# Altium PCB ChassisController.PcbDoc (part 2 of 2)
Units mm, origin at the board's own origin, x right, y up, seen from the top; angles counter-clockwise.
Board outline 110.4 x 66.5 mm, 2 copper layers (Top Layer, Bottom Layer), stack 1.906 mm thick; 125 components, 214 nets, 559 pads, 255 vias.
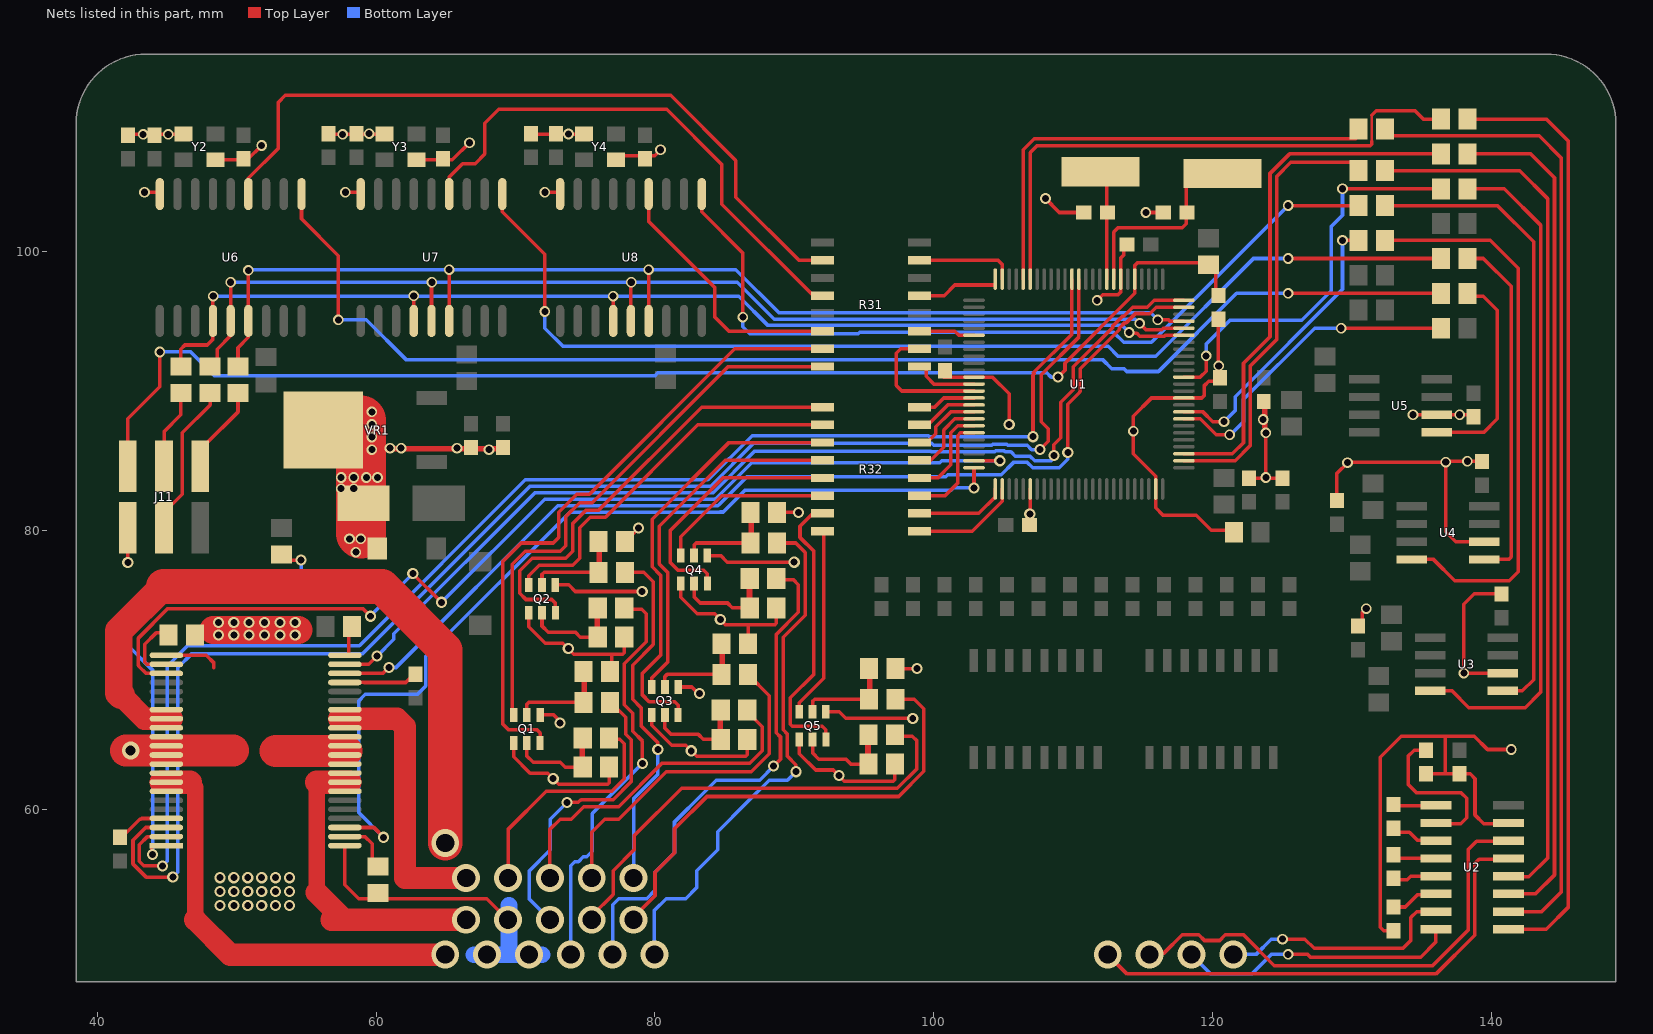
[diagram p2: the nets of this part, all layers, seen from the top]

## Via types
v1: diameter 0.762, hole 0.508, Top Layer to Bottom Layer, 111 vias
v2: diameter 0.8, hole 0.5, Top Layer to Bottom Layer, 71 vias
v3: diameter 2, hole 1.3, Top Layer to Bottom Layer, 60 vias
v4: diameter 1.27, hole 0.711, Top Layer to Bottom Layer, 12 vias
v5: diameter 6.5, hole 6.5, Top Layer to Bottom Layer, 1 vias

## Nets (pads, with @x,y where several pads share a name; then routed paths per layer and width w, separated by ;. In a path a pad name is that pad's centre, name@x,y a point inside that pad or via, vN(x,y) a via of type N, cw(c..) or ccw(c..) an arc to the next point about the centre after c; other vN are vias at no path point) (continued)
CAN_STB_A_link: R52.1 U1.8 | length 22.9
  Top Layer w0.254: U1.8@117.925,88 119.1,88 120.239,86.861 v1(121.207,86.861) ; v1(129.2,94.5) R52.1@136.35,94.5
  Bottom Layer w0.254: v1@121.3,86.9 122.2,87.8 122.2,89.4 127.3,94.5 v1(129.2,94.5)
CAN_STB_B: R47.2 U4.8 | length 40.7
  Top Layer w0.254: R47.2@132.35,100.8 139.9,100.8 141.9,98.8 141.9,77.044 141.256,76.4 137.348,76.4 135.827,77.921 U4.8@134.272,77.921
CAN_STB_B_link: R47.1 U1.9 | length 20.8
  Top Layer w0.254: U1.9@117.925,88.5 119.3,88.5 120,87.8 v1(120.8,87.8) ; v1(129.3,100.8) R47.1@130.45,100.8
  Bottom Layer w0.254: v1(120.8,87.8) 121.6,88.6 121.6,89.6 129.3,97.3 v1(129.3,100.8)
CAN_STB_C: R44.2 U3.8 | length 48.7
  Top Layer w0.254: U3.8@135.6,68.5 137.155,68.5 138.355,67.3 142.4,67.3 143.5,68.4 143.5,101.9 140.9,104.5 R44.2@138.25,104.5
CAN_STB_C_link: R44.1 U1.14 | length 29
  Top Layer w0.254: U1.14@117.925,91 119.1,91 119.525,91.425 v1(119.525,92.525) ; v1(129.3,104.5) R44.1@136.35,104.5
  Bottom Layer w0.254: v1(119.525,92.525) 119.525,93.375 121.233,95.083 126.383,95.083 128.5,97.2 128.5,101.8 129.3,102.6 v1(129.3,104.5)
CAN_TX_A: R50.2 U5.1 | length 15
  Top Layer w0.254: U5.1@136.05,87.03 139.43,87.03 140.4,88 140.4,95.8 139.4,96.8 R50.2@138.4,96.8
CAN_TX_A_link: R50.1 U6.1 | length 93
  Top Layer w0.254: U6.1@54.655,104.125 54.655,102.345 57.3,99.7 57.3,98.9 v1(57.3,95.1) ; v1(125.4,97) R50.1@136.35,97
  Bottom Layer w0.254: v1(57.3,95.1) 59.3,95.1 62.146,92.254 112.088,92.254 112.755,91.587 113.631,91.587 113.818,91.4 116.1,91.4 121.7,97 v1(125.4,97)
CAN_TX_B: R48.2 U4.1 | length 25.4
  Top Layer w0.254: R48.2@138.25,99.5 139.4,99.5 141.4,97.5 141.4,78.1 141.221,77.921 U4.1@139.472,77.921
CAN_TX_B_link: R48.1 U7.1 | length 78.9
  Top Layer w0.254: U7.1@69.055,104.125 69.055,102.845 72.1,99.8 v1(72.1,95.7) ; v1(125.4,99.5) R48.1@136.35,99.5
  Bottom Layer w0.254: v1(72.1,95.7) 72.1,94.5 73.4,93.2 112.5,93.2 113.2,92.5 115.916,92.5 122.916,99.5 v1(125.4,99.5)
CAN_TX_C: R45.2 U3.1 | length 45.7
  Top Layer w0.254: R45.2@132.35,103.3 140.4,103.3 143,100.7 143,69.3 142.2,68.5 U3.1@140.8,68.5
CAN_TX_C_link: R45.1 U8.1 | length 59.5
  Top Layer w0.254: U8.1@83.355,104.125 83.355,102.845 86.3,99.9 v1(86.3,95.3) ; v1(125.4,103.3) R45.1@130.45,103.3
  Bottom Layer w0.254: v1(86.3,95.3) 86.3,94.6 86.792,94.108 94.584,94.108 94.676,94.2 112.9,94.2 113.608,93.492 115.592,93.492 115.6,93.5 v1(125.4,103.3)
CAN_TXF_A: R31.2 U6.4 | length 53.1
  Top Layer w0.254: U6.4@50.845,104.125 50.845,105.245 53,107.4 53,110.7 53.5,111.2 81.126,111.2 85.8,106.526 85.8,103.9 90.325,99.375 R31.2@92.025,99.375
CAN_TXF_A_link: R31.15 U1.49 | length 7.1
  Top Layer w0.254: R31.15@98.975,99.375 104.6,99.375 104.9,99.075 U1.49@104.9,98.025
CAN_TXF_B: R31.4 U7.4 | length 38.5
  Top Layer w0.254: U7.4@65.245,104.125 65.245,105.345 66.2,106.3 67.1,106.3 67.8,107 67.8,109.2 68.8,110.2 80.842,110.2 84.8,106.242 84.8,103.4 91.365,96.835 R31.4@92.025,96.835
CAN_TXF_B_link: R31.13 U1.50 | length 5.7
  Top Layer w0.254: R31.13@98.975,96.835 100.734,96.835 101.499,97.6 U1.50@104.375,97.6
CAN_TXF_C: R31.6 U8.4 | length 18.9
  Top Layer w0.254: U8.4@79.545,104.125 79.545,102.155 84.3,97.4 84.3,95.3 85.305,94.295 R31.6@92.025,94.295
CAN_TXF_C_link: R31.11 U1.56 | length 4
  Top Layer w0.254: R31.11@98.975,94.295 101.505,94.295 101.8,94 U1.56@102.875,94
CCP1A: C2.2 pad.26 | length 5
  Top Layer w0.254: pad.26@57.764,69.101 59.141,69.101 59.14,69.1 62.125,69.1 C2.2@62.55,69.525
CCP1B: C1.2 pad.4 | length 3.9
  Top Layer w0.254: C1.2@41.7,57.925 43.065,59.29 43.143,59.29 43.201,59.348 pad.4@44.964,59.348
CCP2A: 
CCP2B: 
CS_CAN_A: 
CS_CAN_B: 
CS_CAN_C: 
Dig1_link: R31.9 U1.63 | length 4.2
  Top Layer w0.254: R31.9@99.45,91.55 99.45,91.05 100,90.5 U1.63@102.875,90.5
Dig1_Ser: Q1.6 R31.8 | length 40.2
  Top Layer w0.254: Q1.6@69.766,66.775 69.766,77.566 70.7,78.5 73.2,78.5 73.6,78.9 73.6,81 74.6,82 75.5,82 85.255,91.755 R31.8@92.025,91.755
Dig1_Split: Q1.2 R1.1 R2.1 | length 7.3
  Top Layer w0.254: Q1.2@70.816,64.775 70.816,63.825 71.266,63.375 73.216,63.375 73.566,63.025 R1.1@74.791,63.025
  Top Layer w0.4: R1.1@74.791,63.025 R2.1@74.791,65.025
Dig2_link: R31.10 U1.64 | length 9.9
  Top Layer w0.254: R31.10@98.975,93.025 97.625,93.025 97.3,92.7 97.3,90.4 97.7,90 U1.64@102.875,90
Dig2_Ser: Q1.3 R31.7 | length 45.6
  Top Layer w0.254: Q1.3@71.766,64.775 71.766,65.475 71.516,65.725 69.475,65.725 69.1,66.1 69.1,77.8 70.4,79.1 72.7,79.1 73.1,79.5 73.1,81.3 74.4,82.6 75.3,82.6 85.725,93.025 R31.7@92.025,93.025
Dig2_Split: Q1.5 R3.1 R4.1 | length 6.8
  Top Layer w0.254: Q1.5@70.816,66.775 70.816,67.525 70.966,67.675 R3.1@74.866,67.675
  Top Layer w0.4: R3.1@74.916,67.6 R4.1@74.916,69.575
Dig3_link: R32.15 U1.66 | length 4.5
  Top Layer w0.254: R32.15@98.975,87.575 99.575,87.575 101,89 U1.66@102.875,89
Dig3_Ser: Q2.6 R32.2 | length 27.5
  Top Layer w0.254: Q2.6@70.95,76.1 70.95,76.75 71.7,77.5 74.1,77.5 74.6,78 74.6,80.2 75.35,80.95 76.45,80.95 83.075,87.575 R32.2@92.025,87.575
Dig3_Split: Q2.2 R5.1 R6.1 | length 7.3
  Top Layer w0.254: Q2.2@71.9,74.1 71.9,73.15 72.35,72.7 74.3,72.7 74.65,72.35 R5.1@75.875,72.35
  Top Layer w0.4: R5.1@75.875,72.35 R6.1@75.875,74.35
Dig4_link: R32.13 U1.68 | length 5.1
  Top Layer w0.254: R32.13@99.775,85.035 100.7,85.96 100.7,87.2 101.5,88 U1.68@102.875,88
Dig4_Ser: Q3.6 R32.4 | length 25.9
  Top Layer w0.254: Q3.6@79.766,68.775 79.766,69.425 80.9,70.559 80.9,77 80.3,77.6 80.3,80.3 85.035,85.035 R32.4@92.025,85.035
Dig4_Split: Q3.2 R9.1 R10.1 | length 7.3
  Top Layer w0.254: Q3.2@80.716,66.775 80.716,65.825 81.166,65.375 83.116,65.375 83.466,65.025 R9.1@84.691,65.025
  Top Layer w0.4: R9.1@84.691,65.025 R10.1@84.691,67.025
Dig5_link: R32.9 U1.77 | length 6.9
  Top Layer w0.254: R32.9@99.775,79.955 102.755,79.955 104.9,82.1 U1.77@104.9,82.975
Dig5_Ser: Q5.6 R32.8 | length 13.7
  Top Layer w0.254: Q5.6@90.35,67 90.35,67.65 92.107,69.407 R32.8@92.107,79.955
Dig5_Split: Q5.2 R17.1 R18.1 | length 7.3
  Top Layer w0.254: Q5.2@91.3,65 91.3,64.05 91.75,63.6 93.7,63.6 94.05,63.25 R17.1@95.275,63.25
  Top Layer w0.4: R17.1@95.275,63.25 R18.1@95.275,65.25
Dig6_link: R32.11 U1.70 | length 7.8
  Top Layer w0.254: R32.11@98.975,82.5 100.8,82.5 101.7,83.4 101.7,86.8 101.9,87 U1.70@102.875,87
Dig6_Ser: Q4.6 R32.6 | length 12.7
  Top Layer w0.254: Q4.6@81.85,78.2 81.85,79.55 84.8,82.5 R32.6@92.025,82.5
Dig6_Split: Q4.2 R13.1 R14.1 | length 7.3
  Top Layer w0.254: Q4.2@82.8,76.2 82.8,75.25 83.25,74.8 85.2,74.8 85.55,74.45 R13.1@86.775,74.45
  Top Layer w0.4: R13.1@86.775,74.45 R14.1@86.775,76.45
Dig7_link: R32.14 U1.67 | length 4.3
  Top Layer w0.254: R32.14@99.7,86.5 100.127,86.927 100.127,87.427 101.2,88.5 U1.67@102.875,88.5
Dig7_Ser: Q3.3 R32.3 | length 31.5
  Top Layer w0.254: Q3.3@81.666,66.775 81.666,67.475 81.416,67.725 79.575,67.725 79.1,68.2 79.1,69.759 80.4,71.059 80.4,76.793 79.8,77.393 79.8,80.8 85.305,86.305 R32.3@92.025,86.305
Dig7_Split: Q3.5 R11.1 R12.1 | length 6.8
  Top Layer w0.254: Q3.5@80.716,68.775 80.716,69.525 80.866,69.675 R11.1@84.766,69.675
  Top Layer w0.4: R11.1@84.816,69.6 R12.1@84.816,71.575
Dig8_link: R32.10 U1.76 | length 5.7
  Top Layer w0.254: R32.10@99.775,81.225 103.225,81.225 104.4,82.4 U1.76@104.4,82.975
Dig8_Ser: Q5.3 R32.7 | length 20.2
  Top Layer w0.254: R32.7@91.5,81.2 91.3,81.2 90.4,80.3 90.4,79.5 91.4,78.5 91.4,69.7 89.7,68 89.7,66.1 89.85,65.95 92,65.95 92.25,65.7 Q5.3@92.25,65
Dig8_Split: Q5.5 R19.1 R20.1 | length 6.8
  Top Layer w0.254: Q5.5@91.3,67 91.3,67.75 91.45,67.9 R19.1@95.35,67.9
  Top Layer w0.4: R19.1@95.4,67.825 R20.1@95.4,69.8
Dig9_link: R32.12 U1.69 | length 6.8
  Top Layer w0.254: R32.12@98.975,83.765 100.265,83.765 101.2,84.7 101.2,87 101.7,87.5 U1.69@102.875,87.5
Dig9_Ser: Q4.3 R32.5 | length 18.5
  Top Layer w0.254: Q4.3@83.75,76.2 83.75,76.9 83.5,77.15 81.65,77.15 81.1,77.7 81.1,80 84.865,83.765 R32.5@92.025,83.765
Dig9_Split: Q4.5 R15.1 R16.1 | length 6.8
  Top Layer w0.254: Q4.5@82.8,78.2 82.8,78.95 82.95,79.1 R15.1@86.85,79.1
  Top Layer w0.4: R15.1@86.9,79.025 R16.1@86.9,81
Dig10_link: R32.16 U1.65 | length 4.2
  Top Layer w0.254: R32.16@98.975,88.845 100.045,88.845 100.7,89.5 U1.65@102.875,89.5
Dig10_Ser: Q2.3 R32.1 | length 32.9
  Top Layer w0.254: Q2.3@72.85,74.1 72.85,74.8 72.6,75.05 70.75,75.05 70.3,75.5 70.3,77.1 71.2,78 73.6,78 74.1,78.5 74.1,80.5 75.05,81.45 75.95,81.45 83.345,88.845 R32.1@92.025,88.845
Dig10_Split: Q2.5 R7.1 R8.1 | length 6.8
  Top Layer w0.254: Q2.5@71.9,76.1 71.9,76.85 72.05,77 R7.1@75.95,77
  Top Layer w0.4: R7.1@76,76.925 R8.1@76,78.9
Dig_In1: R2.2 | length 17.1
  Top Layer w0.254: v3(69.463,55.085) 69.463,58.563 72.2,61.3 76.9,61.3 77.8,62.2 77.8,64.7 77.475,65.025 R2.2@76.691,65.025
Dig_In2: R3.2 | length 21.7
  Top Layer w0.254: v2(73.7,60.5) 74.5,60.5 74.7,60.7 77,60.7 78.3,62 78.3,65 77.9,65.4 77.9,66.6 76.825,67.675 R3.2@76.766,67.675
  Bottom Layer w0.254: v3(72.463,52.085) 71,53.548 71,55.6 72.5,57.1 72.5,59.3 v2(73.7,60.5)
Dig_In3: R6.2 | length 29.8
  Top Layer w0.254: R6.2@77.775,74.35 79.05,74.35 79.384,74.016 79.384,72.025 77.8,70.441 77.8,67.5 78.4,66.9 78.4,65.6 79.1,64.9 v2(79.1,63.3)
  Bottom Layer w0.254: v3(73.963,49.585) 73.963,55.963 74.258,56.258 74.513,56.258 74.855,56.6 75.1,56.6 75.5,57 75.5,59.7 77.6,61.8 v2(79.1,63.3)
Dig_In4: R10.2 | length 24.3
  Top Layer w0.254: v3(72.463,55.085) 72.463,58.563 73.2,59.3 74,59.3 74.9,60.2 77.4,60.2 80.5,63.3 86.8,63.3 87.7,64.2 87.7,65.916 R10.2@86.591,67.025
Dig_In5: R18.2 | length 33.3
  Top Layer w0.254: v3(75.463,52.085) 75.463,52.363 77,53.9 77,55.6 78.5,57.1 78.5,58.1 81.925,61.525 97.384,61.525 98.784,62.925 98.784,64.916 98.45,65.25 R18.2@97.175,65.25
Dig_In6: R14.2 | length 37
  Top Layer w0.254: v2(88.5,63.1) 89,63.6 89,65.193 88.7,65.493 88.7,72.541 90.284,74.125 90.284,76.116 89.95,76.45 R14.2@88.675,76.45
  Bottom Layer w0.254: v3(76.963,49.585) 76.963,53.163 77.4,53.6 79.4,53.6 80,54.2 80,55.5 81.4,56.9 81.4,59.1 83.5,61.2 84.4,62.1 87.5,62.1 v2(88.5,63.1)
Dig_In7: R11.2 | length 24.7
  Top Layer w0.254: v3(75.463,55.085) 75.463,58.363 76.4,59.3 77.4,59.3 80.8,62.7 86.9,62.7 88.2,64 88.2,68.141 R11.2@86.666,69.675
Dig_In8: R19.2 | length 34.1
  Top Layer w0.254: v3(78.463,52.085) 78.463,52.263 80,53.8 80,55.5 81.4,56.9 81.4,58.6 83.725,60.925 84.725,60.925 97.484,60.925 99.284,62.725 99.284,67.216 98.6,67.9 R19.2@97.25,67.9
Dig_In9: R15.2 | length 38
  Top Layer w0.254: R15.2@88.75,79.1 90.1,79.1 90.784,78.416 90.784,73.925 89.2,72.341 89.2,71.2 89.2,65.7 89.5,65.4 89.5,63.8 90.1,63.2 v2(90.1,62.7)
  Bottom Layer w0.254: v3(79.963,49.585) 79.963,52.763 80.8,53.6 82.2,53.6 83,54.4 83,55.6 84.5,57.1 84.5,58.4 86.6,60.5 88.2,62.1 89.5,62.1 v2(90.1,62.7)
Dig_In10: R7.2 | length 25.6
  Top Layer w0.254: R7.2@77.85,77 79.2,77 79.884,76.316 79.884,71.825 78.4,70.341 78.4,67.9 79,67.3 79,66 80.2,64.8 v2(80.2,64.3)
  Bottom Layer w0.254: v3(78.463,55.085) 78.463,60.763 80.2,62.5 v2(80.2,64.3)
Enable_A: pad.20 U1.74 | length 75.3
  Top Layer w0.254: pad.20@44.964,69.751 43.499,69.751 42.975,70.275 42.975,70.338 42.962,70.351 42.962,72.287 45.075,74.4 59.05,74.4 v2(59.6,73.85) ; v2(62.634,76.909) v2(64.692,74.85) ; U1.74@102.875,85 v2(104.725,85)
  Bottom Layer w0.254: v2@59.588,73.863 v2(62.634,76.909) ; v2(64.692,74.85) 72.092,82.25 84.325,82.25 84.338,82.263 84.364,82.263 86.951,84.85 100.417,84.85 100.567,85 v2(104.725,85)
Enable_B: pad.42 U1.75 | length 66.7
  Top Layer w0.254: pad.42@57.764,58.701 59.849,58.701 v2@60.525,58.025 ; v2(102.875,83.05) U1.75@102.875,84.5
  Bottom Layer w0.254: v2(60.525,58) 58.75,59.775 58.75,67.775 59.225,68.25 62.975,68.25 63.575,68.85 63.575,70.975 73.921,81.321 84.688,81.321 84.692,81.325 84.9,81.325 86.475,82.9 101.225,82.9 101.375,83.05 v2(102.875,83.05)
FB_A: pad.21 R38.2 | length 4.7
  Top Layer w0.254: R38.2@44.825,72.65 44.225,72.65 43.416,71.841 43.416,70.539 43.554,70.401 pad.21@44.964,70.401
FB_B: pad.43 R54.2 | length 3.7
  Top Layer w0.254: pad.43@57.764,58.051 59.199,58.051 59.725,57.525 R54.2@59.725,55.975
GND: C3.2 C6.1 C7.2 C8.1 C9.1 C10.1 C25.2 C26.2 C27.1 C28.1 C29.2 C30.2 C31.1 C32.2 C33.2 C34.1 C35.2 C36.1 C37.2 C38.1 C39.2 C40.2 C41.1 C42.2 C43.1 C44.1 C45.1 C46.2 C47.2 C50.2 J11.6 pad.10 pad.11 pad.12 pad.13 pad.22 pad.32 pad.33 pad.34 pad.35 pad.44 Q1.1 Q1.4 Q2.1 Q2.4 Q3.1 Q3.4 Q4.1 Q4.4 Q5.1 Q5.4 R1.2 R4.2 R5.2 R8.2 R9.2 R12.2 R13.2 R16.2 R17.2 R20.2 R38.1 R54.1 R55.1 U1.11 U1.32 U1.62 U1.81 U1.99 U2.15 U3.2 U4.2 U5.2 U6.9 U7.9 U8.9 VR1.4 Y2.2 Y2.4 Y3.2 Y3.4 Y4.2 Y4.4 ZD1.1 | length 300.1
  Top Layer w0.254: v2(42.2,77.7) J11.6@42.2,80.2 ; C45.1@42.2,108.425 Y2.4@46.2,108.425 ; v1(43.4,104.25) U6.9@44.495,104.25 ; pad.22@44.964,71.051 47.824,71.051 48.375,70.5 48.375,70.15 ; Y2.2@48.5,106.575 50.775,106.575 v1(51.8,107.6) ; C44.1@56.6,108.425 Y3.4@60.6,108.425 ; pad.44@57.764,57.401 57.764,54.586 58.75,53.6 67.948,53.6 v3(69.463,52.085) ; v1(57.8,104.25) U7.9@58.895,104.25 ; Y3.2@62.9,106.575 65.475,106.575 v1(66.7,107.8) ; Q1.1@69.866,64.775 69.866,63.775 71.041,62.6 72.3,62.6 73.1,61.8 76.6,61.8 76.716,61.916 R1.2@76.716,63.025 ; C43.1@70.8,108.4 Y4.4@74.9,108.425 ; Q2.1@70.95,74.1 70.95,73.1 72.125,71.925 73.384,71.925 74.184,71.125 77.684,71.125 77.8,71.241 R5.2@77.8,72.35 ; Q1.4@71.766,66.775 72.725,66.775 73.2,66.3 v2(73.2,66.2) ; v1(72.1,104.25) U8.9@73.195,104.25 ; Q2.4@72.85,76.1 73.809,76.1 74.284,75.625 v2(79.084,75.625) ; R4.2@76.766,69.875 76.9,70.009 76.9,71.125 ; Y4.2@77.1,106.875 79.975,106.875 v1(80.4,107.3) ; R8.2@77.85,79.2 v2(78.825,80.175) ; Q3.1@79.766,66.775 79.766,66.034 81.2,64.6 82.2,64.6 83,63.8 86.5,63.8 86.616,63.916 R9.2@86.616,65.025 ; Q3.4@81.666,68.775 82.625,68.775 83.1,68.3 v2(83.2,68.3) ; Q4.1@81.85,76.2 81.85,75.2 83.025,74.025 84.284,74.025 85.084,73.225 88.584,73.225 88.7,73.341 R13.2@88.7,74.45 ; Q4.4@83.75,78.2 84.709,78.2 85.184,77.725 v2(89.984,77.725) ; R12.2@86.666,71.875 86.675,71.875 86.7,71.9 86.7,73.2 ; R16.2@88.75,81.3 v2(90.3,81.3) ; Q5.1@90.35,65 90.35,64 91.525,62.825 92.784,62.825 93.584,62.025 97.084,62.025 97.2,62.141 R17.2@97.2,63.25 ; Q5.4@92.25,67 93.209,67 93.684,66.525 v2(98.484,66.525) ; R20.2@97.25,70.1 v2(98.8,70.1) ; C32.2@100.7,91 100.702,90.998 104.202,90.998 105.4,89.8 v2(105.4,87.6) ; C39.2@106.9,80.45 U1.81@106.9,82.975 ; v1(108,103.8) 109,102.8 C30.2@110.75,102.8 ; v1(111.7,96.5) 112.1,96.9 113.2,96.9 113.4,97.1 113.4,99.542 113.6,99.742 C42.2@113.6,100.7 ; v1(115.2,102.8) C31.1@116.45,102.8 ; C40.2@120.4,91.2 C41.1@120.4,95.15 ; C40.2@120.5,90.7 119.7,90.7 119.4,90.4 119.4,89.7 119.2,89.5 115.599,89.5 114.3,88.201 v1(114.3,87.125) 114.3,85.5 115.9,83.9 115.9,81.625 116.425,81.1 118.8,81.1 119.875,80.025 R55.1@121.575,80.025 ; C25.2@122.6,83.75 C26.2@125,83.75 ; 123.65,87.4 C10.1@123.65,89.25 ; v1(123.8,83.8) C10.1@123.8,89 ; C9.1@128.9,82.15 128.9,84.1 129.7,84.9 v1(136.7,84.9) ; C8.1@130.7,73.2 130.7,74.1 v1(131,74.4) ; C3.2@132.95,51.3 132.245,51.3 131.995,51.55 131.995,63.74 133.5,65.245 138.75,65.245 139.7,64.295 v1(141.4,64.295) ; v1(134.35,88.3) C29.2@138.7,88.3 ; C6.1@135.4,62.55 138.45,62.55 138.8,62.2 138.8,59.6 139.425,58.975 U2.15@141.55,58.975 ; 136.65,62.55 136.65,65.245 ; C28.1@139.3,84.95 136.7,84.95 136.7,79.9 137.409,79.191 U4.2@139.472,79.191 ; C27.1@140.7,75.45 138.75,75.45 138,74.7 v1(138,69.77) U3.2@140.8,69.77
  Top Layer w0.4: 59.3,85.85 C47.2@69.1,85.85
  Top Layer w2: 48.325,72.876 54.425,72.876
  Top Layer w2.3: v4@42.071,64.221 49.729,64.221 ; 52.81,64.196 57.86,64.196
  Top Layer w3.6: v1@58.925,79.775 VR1.4@58.925,87.875
  Bottom Layer w1.2: v3@67,49.585 v3@71.9,49.585 ; 69.525,49.725 69.525,53.125
  other v1: 58.55,78.45 58.1,79.4 58.9,79.4 57.5,83 58.4,83 57.5,83.8 58.4,83.8 59.3,83.8 60.1,83.8 129.657,84.861 138.257,84.961 59.7,85.8 68.1,85.8 61,85.9 61.8,85.9 65.8,85.9 59.7,86.7 123.8,87 59.7,87.6 123.607,87.961 137.7,88.3 59.7,88.5 120.425,91.8 43.3,108.4 45.1,108.4 57.6,108.4 73.8,108.425 59.5,108.45
  other v2: 48.8,53.1 49.8,53.1 50.8,53.1 51.8,53.1 52.8,53.1 53.8,53.1 48.8,54.1 49.8,54.1 50.8,54.1 51.8,54.1 52.8,54.1 53.8,54.1 48.8,55.1 49.8,55.1 50.8,55.1 51.8,55.1 52.8,55.1 53.8,55.1 72.7,62.2 93.184,62.425 82.6,64.2 73.784,71.525 48.7,72.5 49.8,72.5 50.9,72.5 52,72.5 53.1,72.5 54.2,72.5 48.7,73.4 49.8,73.4 50.9,73.4 52,73.4 53.1,73.4 54.2,73.4 84.684,73.625 106.875,81.175
  other v3: 67.963,49.585 70.963,49.585
  other v4: 42.404,64.221
Hi_Drive_A: pad.25 U1.24 | length 74.7
  Top Layer w0.254: pad.25@57.764,69.751 60.501,69.751 v2(60.925,70.175) ; v2(109.6,85.6) 109.6,89.058 110.454,89.912 110.454,89.954 110.5,90 110.5,91.601 113.292,94.393 113.292,94.493 113.707,94.908 113.807,94.908 114.457,95.558 115.043,95.558 115.055,95.546 115.488,95.546 115.942,96 U1.24@117.95,96
  Bottom Layer w0.254: v2(60.925,70.175) 61.432,70.175 73.032,81.775 84.5,81.775 84.534,81.809 84.552,81.809 86.593,83.85 100.832,83.85 100.982,84 104.825,84 105.702,84.877 106.701,84.877 107.078,84.5 109,84.5 109.6,85.1 v2(109.6,85.6)
Hi_Drive_B: pad.3 U1.38 | length 105.4
  Top Layer w0.254: pad.3@44.964,58.701 43.476,58.701 42.571,57.796 42.571,56.087 43.508,55.15 v2(45.425,55.15) ; v2(107.6,85.8) 108.2,86.4 108.2,87.303 107.7,87.803 107.7,91.175 110.4,93.875 U1.38@110.4,98.025
  Bottom Layer w0.254: v2(45.425,55.15) 45.775,55.5 45.775,70.15 46.8,71.175 59.037,71.175 71.033,83.171 83.988,83.171 87.067,86.25 99.837,86.25 99.983,86.104 104.159,86.104 104.236,86.181 105.214,86.181 105.291,86.104 106.696,86.104 107,85.8 v2(107.6,85.8)
INT_0_CANA: 
INT_0_CANB: 
INT_0_CANC: 
INT_1_CANA: 
INT_1_CANB: 
INT_1_CANC: 
Lo_Drive_A: pad.24 U1.25 | length 74.9
  Top Layer w0.254: pad.24@57.764,70.401 59.476,70.401 v2(60.075,71) ; v2(108.6,85.386) 108.6,86.15 109.1,86.65 109.1,89.2 110,90.1 110,91.743 112.838,94.581 112.838,94.681 113.518,95.362 113.618,95.362 114.269,96.012 115.231,96.012 115.243,96 115.3,96 115.8,96.5 U1.25@117.925,96.5
  Bottom Layer w0.254: v2(60.075,71) 61.275,72.2 61.275,72.599 71.393,82.717 84.176,82.717 87.134,85.675 99.77,85.675 99.795,85.65 104.347,85.65 104.424,85.727 105.026,85.727 105.103,85.65 105.525,85.65 105.844,85.331 106.889,85.331 107.221,85 108.4,85 108.6,85.2 v2(108.6,85.386)
Lo_Drive_B: pad.2 U1.39 | length 101.1
  Top Layer w0.254: v2(44.675,55.95) 43.35,55.95 43.025,56.275 43.025,57.461 43.615,58.051 pad.2@44.964,58.051 ; v2(107.107,86.721) 107.107,91.139 107.2,91.232 107.125,91.307 109.9,94.082 U1.39@109.9,98.025
  Bottom Layer w0.254: v2(44.675,55.95) 45.025,56.3 45.025,70.275 46.475,71.725 58.81,71.725 70.71,83.625 83.8,83.625 86.975,86.8 99.61,86.8 99.688,86.721 v2(107.107,86.721)
MAX_pin1: C5.1 U2.1 | length 3.2
  Top Layer w0.254: C5.1@133.2,60.256 U2.1@136.35,60.256
MAX_pin2: C6.2 U2.2 | length 11.6
  Top Layer w0.254: C6.2@135.4,64.25 134.45,64.25 134,63.8 134,61.8 134.6,61.2 137.8,61.2 138.2,60.8 138.2,59.4 137.775,58.975 U2.2@136.35,58.975
MAX_pin3: C5.2 U2.3 | length 3.6
  Top Layer w0.254: C5.2@132.95,58.35 134.1,58.35 134.65,57.8 U2.3@136.35,57.8
MAX_pin4: C4.1 U2.4 | length 3
  Top Layer w0.254: C4.1@133.3,56.5 U2.4@136.35,56.5
MAX_pin5: C4.2 U2.5 | length 3.5
  Top Layer w0.254: C4.2@132.95,54.95 133.95,54.95 134.2,55.2 U2.5@136.35,55.2
MAX_pin6: C3.1 U2.6 | length 3.8
  Top Layer w0.254: C3.1@132.95,53 133.8,53 134.695,53.895 U2.6@136.35,53.895
MISO: R37.2 U1.22 U6.15 U7.15 U8.15 | length 83.2
  Top Layer w0.254: R37.2@50.1,91.75 50.1,93.1 50.845,93.845 v1(50.845,98.655) ; U7.15@65.245,95.025 v1(65.245,98.7) ; U8.15@79.545,95.025 v1(79.545,98.7) ; v1(116.05,95.1) 116.55,95.1 ; 116.575,95.1 116.825,95.1 116.925,95 U1.22@117.925,95
  Bottom Layer w0.254: v1@50.845,98.7 v1(79.545,98.7) 85.8,98.7 88.892,95.608 115.542,95.608 v1(116.05,95.1)
MISO_link: J11.1 R37.1 | length 6.5
  Top Layer w0.254: J11.1@47.7,84.3 47.7,86.1 50.1,88.5 R37.1@50.1,89.85
MOSI: R36.2 U1.21 U6.14 U7.14 U8.14 | length 81.8
  Top Layer w0.254: R36.2@48.6,91.7 48.6,93 49.575,93.975 v1(49.575,97.8) ; U7.14@63.975,95.025 v1@63.975,97.7 ; U8.14@78.275,95.025 v1@78.275,97.8 ; v1(114.75,94.85) 115.208,94.392 116.343,94.392 116.451,94.5 U1.21@117.925,94.5
  Bottom Layer w0.254: v1(49.575,97.8) v1(78.3,97.8) 85.9,97.8 88.546,95.154 114.446,95.154 v1(114.75,94.85)
  other v1: 64,97.8
MOSI_link: J11.4 R36.1 | length 10.1
  Top Layer w0.254: J11.4@44.7,81.2 46.1,82.6 46.1,87 48.1,89 R36.1@48.1,89.85
NewNet: 
OUT1A: pad.14 pad.15 pad.16 | length 49.5
  Top Layer w1.6: 41.7,68.191 43.39,66.501 pad.15@45.36,66.501
  Top Layer w2: 41.7,68.191 41.548,68.343 41.548,72.779 44.753,75.984
  Top Layer w2.5: 44.753,75.984 60.416,75.984 64.963,71.437 v3(64.963,57.585)
OUT1B: pad.29 pad.30 pad.31 | length 20.2
  Top Layer w1.6: pad.30@57.36,66.501 61.501,66.501 62.075,65.927 62.075,55.085 v3(66.463,55.085)
OUT1C: pad.36 pad.37 pad.38 | length 22.7
  Top Layer w1.2: 55.745,54.045 55.745,61.951
  Top Layer w1.6: 55.745,54.045 57.705,52.085 ; 56.805,52.085 v3(66.463,52.085)
  Top Layer w1.7: 55.745,61.951 pad.37@58.11,61.951
OUT1D: pad.7 pad.8 pad.9 | length 31
  Top Layer w1.2: 46.654,61.951 47.034,61.572 47.034,52.088
  Top Layer w1.6: 47.034,52.088 49.537,49.585 v3(64.963,49.585)
  Top Layer w1.7: pad.8@44.61,61.951 46.654,61.951
OUT2A: 
OUT2B: 
OUT2C: 
OUT2D: 
RESET: C41.2 J11.5 R27.2 U1.30 | length 92.8
  Top Layer w0.254: J11.5@42.2,84.6 42.2,88 44.5,90.3 v1(44.5,92.8) ; v1(108.9,91) 109.4,91.5 109.4,92 114.4,97 114.4,99 114.6,99.2 119.7,99.2 120.2,98.7 C41.2@120.2,96.7
  Bottom Layer w0.254: v1(44.5,92.8) 46.7,92.8 48.4,91.1 80,91.1 80.2,91.3 108.1,91.3 108.4,91 v1(108.9,91)
RS232_RX1: U2.13 | length 36.1
  Top Layer w0.254: v3(112.463,49.585) 113.848,48.2 136,48.2 138.786,50.986 138.786,56.131 139.09,56.435 U2.13@141.55,56.435
RS232_RX2: U2.8 | length 20.1
  Top Layer w0.254: v1(125.4,49.6) 126.8,49.6 127,49.4 133.2,49.4 134.9,49.4 136,50.5 U2.8@136,51.4
  Bottom Layer w0.254: v3(118.463,49.585) 119.848,48.2 122.8,48.2 124.2,49.6 v1(125.4,49.6)
RS232_TX1: U2.14 | length 35.2
  Top Layer w0.254: v3@115.2,49.7 116.5,49.7 117.8,51 119,51 119.4,50.6 120.5,50.6 120.9,51 122.2,51 124.403,48.797 135.753,48.797 138.3,51.345 138.3,57.095 138.91,57.705 U2.14@141.55,57.705
  other v3: 115.463,49.585
RS232_TX2: U2.7 | length 17.3
  Top Layer w0.254: v1(125,50.7) 126.6,50.7 127.264,50.036 132.936,50.036 133.636,50.036 134.2,50.6 134.2,52.245 134.625,52.67 U2.7@136,52.67
  Bottom Layer w0.254: v3@121.463,49.6 123.1,49.6 124.2,50.7 v1(125,50.7)
  other v3: 121.463,49.585
RX1_232link: R43.1 U1.2 | length 31.8
  Top Layer w0.254: U1.2@117.925,85 121.6,85 122.7,86.1 122.7,91.8 124.6,93.7 124.6,105.4 125.6,106.4 129.85,106.4 R43.1@130.45,105.8
RX1_232ttl: R43.2 U2.12 | length 62.8
  Top Layer w0.254: R43.2@132.35,105.8 142,105.8 144,103.8 144,56.5 142.665,55.165 U2.12@141.55,55.165
RX2_232link: R40.1 U1.45 | length 41.2
  Top Layer w0.2: 131.4,107.9 131.4,109.7
  Top Layer w0.254: U1.45@106.9,98.025 106.9,107.1 107.4,107.6 131.3,107.6 131.4,107.7 131.4,107.9 ; 131.387,109.775 131.713,110.1 134.5,110.1 135.1,109.5 R40.1@136.35,109.5
RX2_232ttl: R40.2 U2.9 | length 67.8
  Top Layer w0.254: R40.2@138.25,109.5 143.9,109.5 145.5,107.9 145.5,53 143.9,51.4 U2.9@141.2,51.4
RX3_232out: 
RX3_232ttl: 
RX4_232out: 
RX4_232ttl: 
SCK: R35.2 U1.20 U6.13 U7.13 U8.13 | length 81.3
  Top Layer w0.254: R35.2@46,91.75 46,93 46.3,93.3 47.9,93.3 48.305,93.705 v1@48.305,96.7 ; U7.13@62.705,95.025 v1@62.705,96.7 ; U8.13@77.005,95.025 v1@77.005,96.8 ; v1@113.875,94.325 v1(114,94.2) 114.058,94.142 114.558,94.142 114.762,93.938 116.531,93.938 116.593,94 U1.20@117.925,94
  Bottom Layer w0.254: v1@48.3,96.8 86,96.8 88.1,94.7 113.5,94.7 v1(114,94.2)
  other v1: 48.325,96.8 77,96.8 62.7,96.825
SCK_link: J11.3 R35.1 | length 5.3
  Top Layer w0.254: J11.3@44.8,85 44.8,87.1 46,88.3 R35.1@46,89.85
STATUS_A: pad.23 R53.1 | length 3.1
  Top Layer w0.254: pad.23@57.764,71.051 58.151,71.051 58.05,71.152 R53.1@58.05,73.7
STATUS_B: pad.1 R39.1 | length 34.3
  Top Layer w0.254: v2@43.9,56.775 pad.1@43.9,57.4 ; pad.1@44.964,57.401 pad.1@45.575,57.401 ; R39.1@53.525,77.875 v2(54.625,77.875)
  Bottom Layer w0.254: v2(43.975,56.775) 43.975,70 42.35,71.625 42.35,73.2 44.1,74.95 52.875,74.95 54.625,76.7 v2(54.625,77.875)
TX1_232link: R41.1 U1.3 | length 37.5
  Top Layer w0.254: U1.3@117.925,85.5 121.4,85.5 122.2,86.3 122.2,92 124.1,93.9 124.1,105.6 125.5,107 R41.1@136.35,107
TX1_232ttl: R41.2 U2.11 | length 61.3
  Top Layer w0.254: R41.2@138.25,107 142.8,107 144.5,105.3 144.5,55.3 143.14,53.94 U2.11@141.2,53.94 ; U2.11@141.55,53.895 U2.11@142.025,53.895
TX2_232link: R42.1 U1.46 | length 33.7
  Top Layer w0.254: U1.46@106.4,98.025 106.4,107.3 107.2,108.1 130.25,108.1 R42.1@130.45,108.3
TX2_232ttl: R42.2 U2.10 | length 70.3
  Top Layer w0.254: R42.2@132.35,108.3 143.4,108.3 145,106.7 145,54.1 143.57,52.67 U2.10@141.2,52.67
TX3_232out: 
TX3_232ttl: 
TX4_232out: 
TX4_232ttl: 
TX_0_CANA: 
TX_0_CANB: 
TX_0_CANC: 
TX_1_CANA: 
TX_1_CANB: 
TX_1_CANC: 
XTAL1: C30.1 U1.34 Y1.2 | length 10
  Top Layer w0.254: Y1.2@111.95,105.725 112.675,105 Y1.2@114.3,105 ; U1.34@112.4,98.025 Y1.2@112.4,105.4
XTAL2: C31.2 U1.33 Y1.1 | length 12.3
  Top Layer w0.254: U1.33@112.9,98.025 112.9,101.4 113.2,101.7 117.8,101.7 118.1,102 118.1,105.2 Y1.1@118.3,105.4
pads on no net: R30.7 R30.8 R30.9 R30.10 U1.1 U1.4 U1.5 U1.6 U1.7 U1.15 U1.16 U1.17 U1.18 U1.23 U1.27 U1.28 U1.29 U1.35 U1.36 U1.37 U1.40 U1.41 U1.42 U1.47 U1.48 U1.51 U1.52 U1.53 U1.54 U1.55 U1.57 U1.58 U1.59 U1.60 U1.71 U1.72 U1.73 U1.78 U1.79 U1.82 U1.83 U6.3 U6.5 U6.6 U6.10 U6.11 U7.3 U7.5 U7.6 U7.10 U7.11 U8.3 U8.5 U8.6 U8.10 U8.11
copper on no net: | length 0
  Top Layer w0.254: v3(87.463,52.085) v3@87.511,52.085
  other v3: 82.963,49.585 85.963,49.585 88.963,49.585 81.463,52.085 84.463,52.085 81.463,55.085 84.463,55.085 87.463,55.085 73.963,57.585 76.963,57.585 79.963,57.585 82.963,57.585 85.963,57.585 88.963,57.585
  other v5: 93.197,109.152

## Polygon pours and split planes (outlines as drawn)
AGND on Bottom Layer "Analogue_Ground" (solid, remove dead copper, pour order 2): 102.2,48.1 110.9,48.1 113,50.2 113.3,50.5 114.8,50.5 115.1,50.5 116,51.4 116,53.4 116,55.6 117.9,57.5 117.8,57.6 117.8,58.9 119,58.9 122.7,62.6 125,62.6 125.5,62.6 126.4,63.5 126.5,63.6 126.5,79 126.4,79 124.2,81.2 123.1,82.3 121.1,82.3 118.1,82.3 117.3,83.1 117.2,83.2 117.2,83.85 116.725,84.325 107.8,84.325 107.5,84.025 107.5,81.1 107.5,80.8 106.8,80.1 106.6,79.9 100.4,79.9 96.5,79.9 94.7,78.1 94,77.4 94,75.5 94,74.2 96.2,72 97.1,71.1 98.6,71.1 100.2,71.1 101.5,69.8 101.5,61.9 101.5,61.5 99,59 99,51 99,50.6 101.3,48.3 101.5,48.1
GND on Bottom Layer "Power_Ground" (solid, remove dead copper, pour order 4): 146.9,47.8 146.9,57.3 146.9,108.9 143.7,112.1 138.9,112.1 107.6,112.1 97.6,102.1 97.1,101.6 91.7,101.6 89.7,101.6 83.7,107.6 83.7,109.8 83.7,111.9 81,111.9 43.3,111.9 40.6,109.2 40.6,107.4 40.6,47.8 45.5,47.8 146.9,47.8

## Other copper
Top Layer:
  region net GND: 54.691,58 54.691,70.632 52.795,70.632 52.795,73.957 49.871,73.957 49.873,70.609 47.92,70.609 47.92,58 49.8,58 49.8,54.557 52.82,54.557 52.8,54.577 52.8,58
  region net GND: 48.195,57.296 48.195,52.5 54.469,52.5 54.469,57.296

## Silkscreen, mask and mechanical layers (free items; w line width, h text height)
Top Overlay:
  drawing of 1460 lines, arcs and shapes, not listed
  text "1" at 63.95,58.621 h1.2
  text "Chassis" at 55.9,49.8 h1.2
  text "Control" at 55.9,48 h1.2
Top Paste:
  region: 54.635,57.976 54.635,70.576 52.739,70.576 52.739,73.901 49.864,73.901 49.864,70.576 47.839,70.576 47.864,70.551 47.864,57.976 49.839,57.976 49.864,57.951 49.864,54.501 52.764,54.501 52.739,54.526 52.739,57.976
Top Solder:
  region: 54.635,57.976 54.635,70.576 52.739,70.576 52.739,73.901 49.864,73.901 49.864,70.576 47.839,70.576 47.864,70.551 47.864,57.976 49.839,57.976 49.864,57.951 49.864,54.501 52.764,54.501 52.739,54.526 52.739,57.976
Mechanical 1:
  the board outline again, w0.254
Mechanical 13:
  circle w0.127: c121.447,49.652 r0.5
  circle w0.127: c119.947,52.152 r0.5
  circle w0.127: c119.947,55.152 r0.5
  circle w0.127: c121.447,57.652 r0.5
  circle w0.127: c103.447,57.652 r0.5
  circle w0.127: c104.947,55.152 r0.5
  circle w0.127: c104.947,52.152 r0.5
  circle w0.127: c103.447,49.652 r0.5
  circle w0.127: c88.947,49.652 r0.5
  circle w0.127: c87.447,52.152 r0.5
  circle w0.127: c87.447,55.152 r0.5
  circle w0.127: c88.947,57.652 r0.5
  circle w0.127: c66.447,55.152 r0.5
  circle w0.127: c65.847,49.652 r0.5
  circle w0.127: c66.447,52.152 r0.5
  lines w0.127: 86.197,109.152 ccw(c93.197,109.152) 100.197,109.152